# Altium PCB PCB1.PcbDoc
Units mil, origin at the board's own origin, x right, y up, seen from the top; angles counter-clockwise.
Board outline 6000 x 4000 mil, 2 copper layers (Top Layer, Bottom Layer); 15 components, 45 nets, 102 pads, 0 vias.
Unrouted connection lines stored in the file: 38.
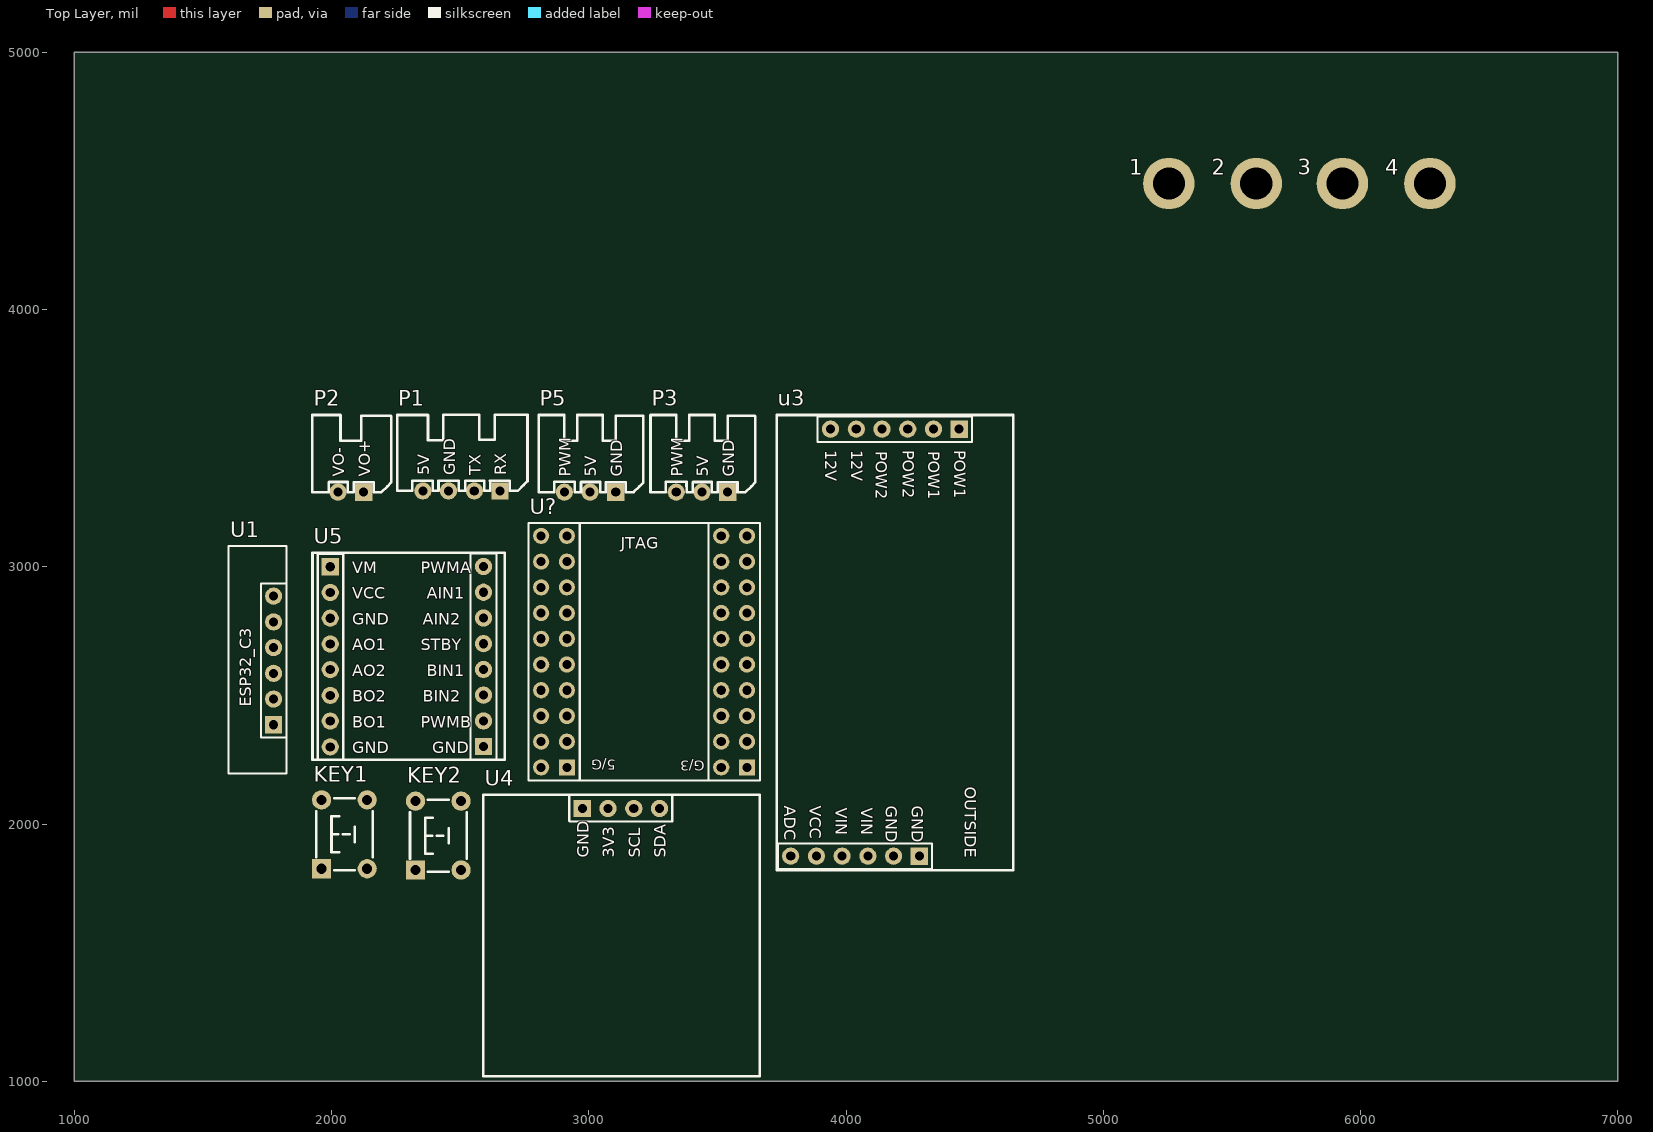
[diagram p0: Top Layer view]
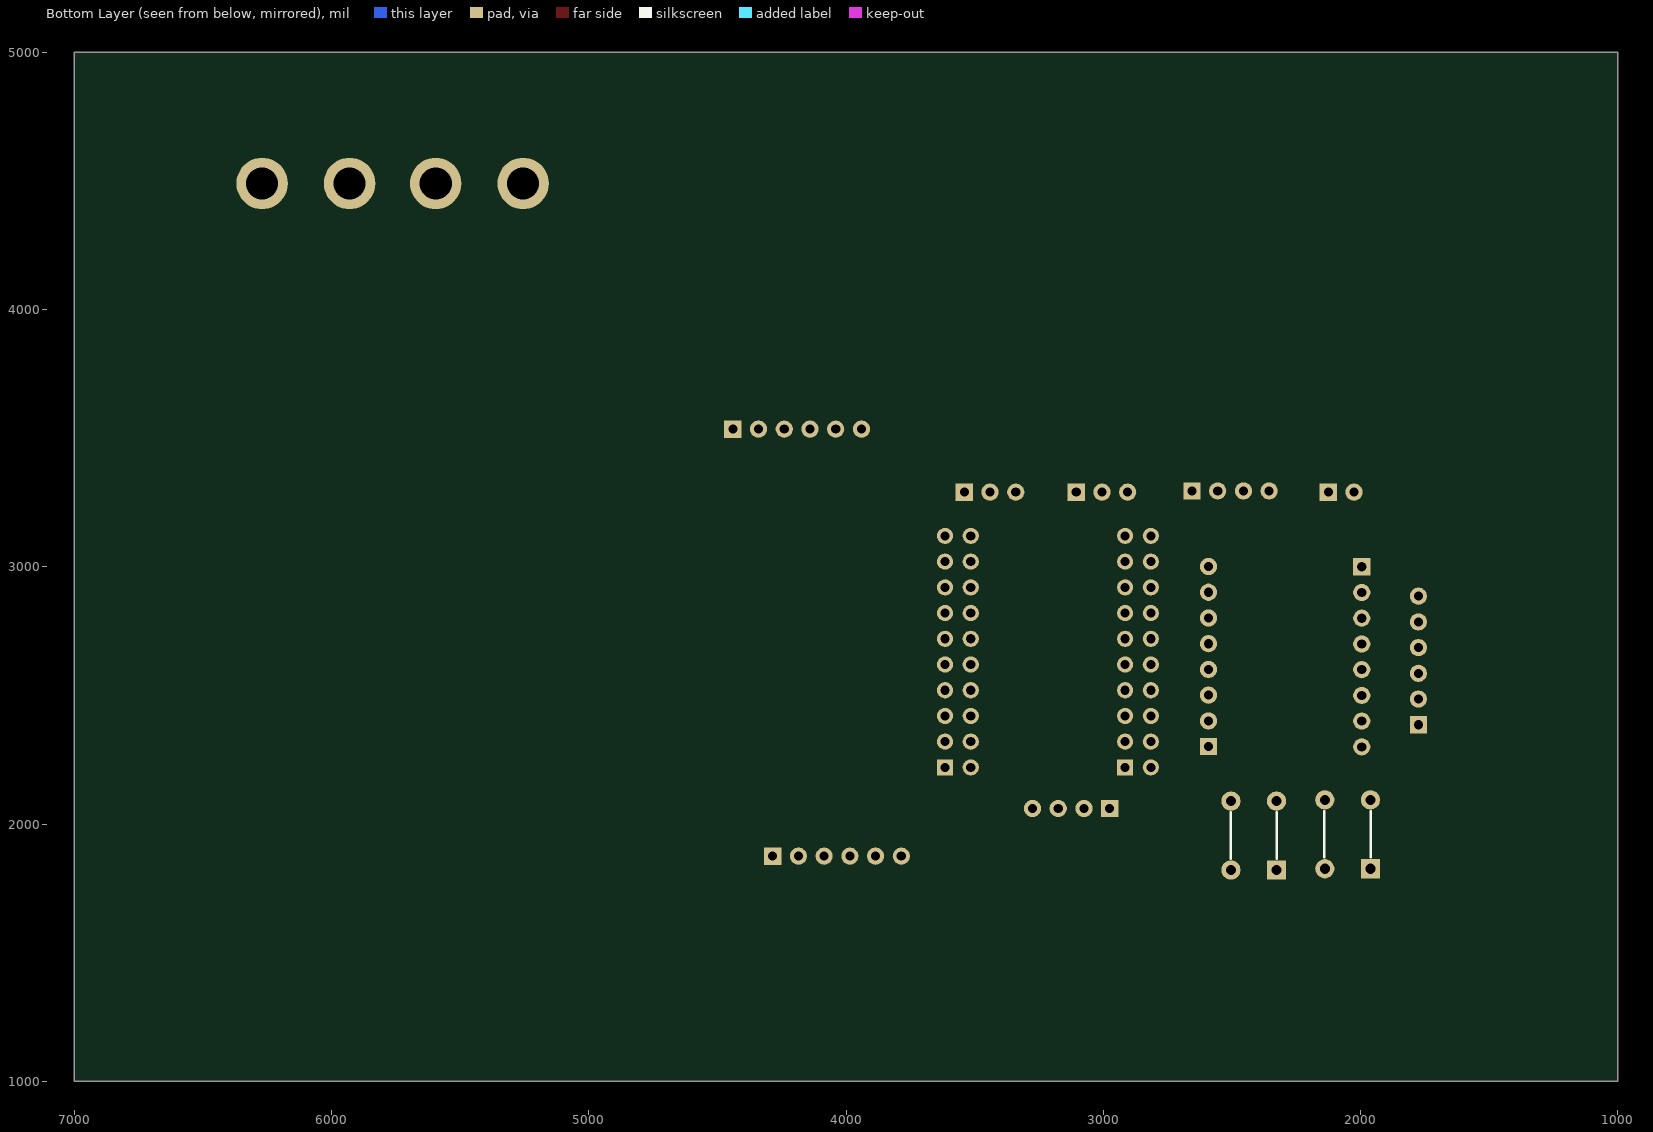
[diagram p1: Bottom Layer view, seen from below]

## Layer stack, top to bottom
Top Solder: solder mask 0.4, Solder Resist, Dk 3.5
Top Layer: signal copper 1.4
Dielectric 1: dielectric 12.6, FR-4, Dk 4.8
Bottom Layer: signal copper 1.4
Bottom Solder: solder mask 0.4, Solder Resist, Dk 3.5

## Board outline
1000,1000 7000,1000 7000,5000 1000,5000

## Design rules (kind name [scope] priority, off if disabled: settings)
Clearance [All] p1: gap=10 ignorepadtopadclearanceinfootprint=FALSE
PolygonConnect [All] p1: connectstyle=Relief reliefconductorwidth=10 reliefentries=4 polygonreliefangle="90 Angle" airgapwidth=10
RoutingVias [All] p1: holewidth=28 width=50 viastyle="Through Hole" minholewidth=28 minwidth=50 maxholewidth=28 maxwidth=50
SolderMaskExpansion [All] p1: expansion=4 istentingtop=FALSE
SupplyNets "Schematic Supply Nets_5" [InNet('5V')] p1: voltage=0.000
SupplyNets "Schematic Supply Nets_4" [InNet('5V_POW')] p2: voltage=0.000
SupplyNets "Schematic Supply Nets_3" [InNet('12V')] p3: voltage=0.000
SupplyNets "Schematic Supply Nets_2" [InNet('3V3_MCU')] p4: voltage=0.000
SupplyNets "Schematic Supply Nets_1" [InNet('3V3')] p5: voltage=0.000
SupplyNets "Schematic Supply Nets" [InNet('GND')] p6: voltage=0.000
Width [All] p1: maxlimit=10 minlimit=10 preferedwidth=10
30 further rules are at their usual default settings.

## Components (designator, comment, footprint, x,y, rotation, side; value= is the part's Value field where it differs from the comment)
1 "M3" "M3 125X200" 5255,4490 r90 top
2 "M3" "M3 125X200" 5595,4490 r90 top
3 "M3" "M3 125X200" 5930,4490 r90 top
4 "M3" "M3 125X200" 6270,4490 r90 top
KEY1 "mod_buttom" MOD_BUTTOM 2050,1950 r90 top
KEY2 "mod_buttom" MOD_BUTTOM 2415,1945 r90 top
P1 "port_uart_4p" XH2.54_4P 2510,3450 r0 top
P2 "port_mot_2p" XH2.54_2P 2070,3415 r0 top
P3 "port_pwm_3p" XH2.54_3P 3455,3425 r0 top
P5 "port_pwm_3p" XH2.54_3P 3020,3425 r0 top
U1 "c3_hw_1" C3_HW_1 1774.91,2635.64 r90 top
u3 "pow_hw_2" POW_HW_2 4210,2760 r270 top
U4 "mod_oled" mod_oled 3129.91,2058.15 r0 top
U5 "mod_tb6612" MOD_TB6612 2300,2650 r0 top
U? "f1_hw_1_gw" F1_HW_1_GW 3225,2685 r270 top

## Footprints (in the part's own frame and the unit in brackets; to place one, negate y for a bottom-side part, rotate by r counter-clockwise, add the part's x,y. Pads: shape width x height; smd on the part's side, far side on the other; paste and mask are expansions set on the pad)
C3_HW_1 [mm]
  rect 1.7x1.7 hole 0.9: 1(-6.35,0)
  round 1.7 hole 0.9: 2(-3.81,0) 3(-1.27,0) 4(1.27,0) 5(3.81,0) 6(6.35,0)
  silkscreen extent -11.18,-1.27 11.3,4.45, body extent -11.18,-1.27 11.3,4.45, height 8.5
F1_HW_1_GW [mm]
  rect 1.6x1.6 hole 0.9: 1(11.811,9.906) 21(11.811,-7.874)
  round 1.6 hole 0.9: 2(11.811,7.366) 3(9.271,9.906) 4(9.271,7.366) 5(6.731,9.906) 6(6.731,7.366) 7(4.191,9.906) 8(4.191,7.366) 9(1.651,9.906) 10(1.651,7.366) 11(-0.889,9.906) 12(-0.889,7.366) 13(-3.429,9.906) 14(-3.429,7.366) 15(-5.969,9.906) 16(-5.969,7.366) 17(-8.509,9.906) 18(-8.509,7.366) 19(-11.049,9.906) 20(-11.049,7.366) 22(11.811,-10.414) 23(9.271,-7.874) 24(9.271,-10.414) 25(6.731,-7.874) 26(6.731,-10.414) 27(4.191,-7.874) 28(4.191,-10.414) 29(1.651,-7.874) 30(1.651,-10.414) 31(-0.889,-7.874) 32(-0.889,-10.414) 33(-3.429,-7.874) 34(-3.429,-10.414) 35(-5.969,-7.874) 36(-5.969,-10.414) 37(-8.509,-7.874) 38(-8.509,-10.414) 39(-11.049,-7.874) 40(-11.049,-10.414)
  silkscreen extent -12.32,-11.68 13.08,11.18, body extent -12.38,-11.68 13.08,11.18, height 8.5
"M3 125X200" [mil] "M3螺丝孔，孔125Mil，焊盘200Mil"
  round 200 hole 125: 1(0,0)
MOD_BUTTOM [mm]
  rect 1.9x1.9 hole 1: 1(-3.146,2.25)
  round 1.9 hole 1: 2(-3.146,-2.25) 3(3.654,-2.25) 4(3.654,2.25)
  silkscreen extent -3.3,-2.79 3.81,2.79, body extent -3.85,-3 4.36,3, height 4.25
mod_oled [mm] "外购屏幕模块接口"
  rect 1.7x1.7 hole 0.9: 1(-3.935,0.047)
  round 1.7 hole 0.9: 2(-1.395,0.047) 3(1.145,0.047) 4(3.685,0.047)
  silkscreen extent -13.72,-26.4 13.58,1.4, body extent -13.72,-26.42 13.59,1.4, height 8.5
MOD_TB6612 [mm]
  rect 1.7x1.7 hole 0.9: 1(-7.747,8.89) 16(7.391,-8.867)
  round 1.7 hole 0.9: 2(-7.747,6.35) 3(-7.747,3.81) 4(-7.747,1.27) 5(-7.747,-1.27) 6(-7.747,-3.81) 7(-7.747,-6.35) 8(-7.747,-8.89) 9(7.391,8.913) 10(7.391,6.373) 11(7.391,3.833) 12(7.391,1.293) 13(7.391,-1.247) 14(7.391,-3.787) 15(7.391,-6.327)
  silkscreen extent -9.5,-10.16 9.5,10.29, body extent -9.5,-10.16 9.5,10.29, height 8.5
POW_HW_2 [mm] "pow_hw_2"
  round 1.7 hole 0.9: 0(22.479,-8.255) 1(22.479,-5.715) 1(22.479,-3.175) 2(22.479,-0.635) 3(-19.685,-6.858) 3(-19.685,-4.318) 4(-19.685,-1.778) 4(-19.685,0.762) 5(-19.685,3.302) 6(22.479,-10.795)
  rect 1.7x1.7 hole 0.9: 2(22.479,1.905) 5(-19.685,5.842)
  silkscreen extent -21.08,-12.19 23.88,11.18, body extent -21.08,-12.19 23.88,11.18, height 8.5
XH2.54_2P [mm]
  rect 1.7x1.7 hole 0.9: 1(1.397,-3.175)
  round 1.7 hole 0.9: 2(-1.143,-3.175)
  silkscreen extent -3.68,-3.17 4.11,4.44, body extent -3.64,-3.52 3.9,4.17, height 5.73
XH2.54_3P [mm]
  rect 1.7x1.7 hole 0.9: 1(2.159,-3.429)
  round 1.7 hole 0.9: 2(-0.381,-3.429) 3(-2.921,-3.429)
  silkscreen extent -5.46,-3.43 4.87,4.19, body extent -5.42,-3.78 4.66,3.92, height 5.73
XH2.54_4P [mm]
  rect 1.7x1.7 hole 0.9: 1(3.683,-3.937)
  round 1.7 hole 0.9: 2(1.143,-3.937) 3(-1.397,-3.937) 4(-3.937,-3.937)
  silkscreen extent -6.48,-3.94 6.4,3.59, body extent -6.44,-4.29 6.18,3.41, height 5.73

## Part data
1 2 3 4: library part prot_m3, "m3铜柱孔", BOM名称=铜柱孔, 学习资源=www.ooocke.com, 版权归属=源创客
KEY1 KEY2: "6*6*4.3按键"
P1: "串口接口/SPP蓝牙模块 / XH2.54弯排针4p/4p排母"
P2: "开环直流电机接口 / XH2.54弯排针2p"
P3 P5: "舵机接口 / XH2.54弯排针3p"
U1: "ESP32C3蓝牙模块 / 6p排母"
u3: "两路升降压电源模块 / 6p排母*2"
U4: "外购屏幕模块"
U5: "TB6612模块 / 8p排母*2"

## Nets (pads, with @x,y where several pads share a name; then routed paths per layer and width w, separated by ;. In a path a pad name is that pad's centre, name@x,y a point inside that pad or via, vN(x,y) a via of type N, cw(c..) or ccw(c..) an arc to the next point about the centre after c; other vN are vias at no path point)
3V3: U4.2 U5.2 U5.12
3V3_MCU: U?.2
5V: P1.4 U1.5 u3.5 U?.21
5V_POW: P3.2 P5.2 u3.4
12V: u3.3 U5.1
AO1: P2.1 U5.4
AO2: P2.2 U5.5
BOOT0: U?.35
GND: KEY1.4 KEY2.4 P1.3 P3.1 P5.1 U1.4 u3.2 U4.1 U5.3 U5.8 U5.16 U?.1 U?.22
NRST: U?.12
PA0: U?.20
PA1: U?.19
PA2: P1.2 U?.18
PA3: U?.17
PA4: U?.16
PA5: U?.15
PA6: U5.9 U?.14
PA7: U?.13
PA8: U5.11 U?.23
PA9: U1.2 U?.24
PA10: U1.3 U?.25
PA11: U?.26
PA12: U?.27
PA13: U?.28
PA14: U?.29
PA15: P3.3 U?.30
PB0: U?.11
PB1: U?.9
PB2: U?.10
PB3: P5.3 U?.32
PB4: U4.4 U?.31
PB5: U4.3 U?.34
PB6: U?.33
PB7: U?.36
PB8: U5.10 U?.38
PB9: U?.37
PB10: U?.7
PB11: U?.8
PB12: U?.5
PB13: U?.6
PB14: KEY1.3 U?.3
PB15: KEY2.3 U?.4
PC13: U?.39
USART2_RX: P1.1
VBAT: U?.40
pads on no net: 1.1 2.1 3.1 4.1 KEY1.1 KEY1.2 KEY2.1 KEY2.2 U1.1 U1.6 u3.0 u3.1 u3.6 U5.6 U5.7 U5.13 U5.14 U5.15

## Text inside footprints (layer, text, board x,y; h text height)
P1: Top Overlay "5V" at 2380,3355 h45 r90; Top Overlay "GND" at 2480,3355 h45 r90; Top Overlay "TX" at 2580,3355 h45 r90; Top Overlay "RX" at 2680,3355 h45 r90
P2: Top Overlay "VO-" at 2050,3350 h45 r90; Top Overlay "VO+" at 2150,3350 h45 r90
P3: Top Overlay "GND" at 3565,3350 h45 r90; Top Overlay "5V" at 3465,3350 h45 r90; Top Overlay "PWM" at 3365,3350 h45 r90
P5: Top Overlay "GND" at 3130,3350 h45 r90; Top Overlay "5V" at 3030,3350 h45 r90; Top Overlay "PWM" at 2930,3350 h45 r90
U1: Top Overlay "ESP32_C3" at 1687.41,2455.64 h45 r90
u3: Top Overlay "POW2" at 4115,3450 h45 r270; Top Overlay "POW1" at 4320,3450 h45 r270; Top Overlay "12V" at 3920,3452.38 h45 r270; Top Overlay "12V" at 4020,3452.38 h45 r270; Top Overlay "POW2" at 4220,3452.38 h45 r270; Top Overlay "POW1" at 4420,3452.38 h45 r270; Top Overlay "GND" at 4155,2070 h45 r270; Top Overlay "GND" at 4255,2070 h45 r270; Top Overlay "VIN" at 3960,2062.5 h45 r270; Top Overlay "VIN" at 4060,2062.5 h45 r270; Top Overlay "ADC" at 3760,2070 h45 r270; Top Overlay "VCC" at 3860,2070 h45 r270; Top Overlay "OUTSIDE" at 4461.23,2144.16 h45 r270
U4: Top Overlay "3V3" at 3099.91,1868.15 h45 r90; Top Overlay "SCL" at 3199.91,1868.15 h45 r90; Top Overlay "SDA" at 3299.91,1868.15 h45 r90; Top Overlay "GND" at 2999.91,1868.15 h45 r90
U5: Top Overlay "VM" at 2080,2975 h45; Top Overlay "VCC" at 2080,2875 h45; Top Overlay "AO1" at 2080,2675 h45; Top Overlay "AO2" at 2080,2575 h45; Top Overlay "BO1" at 2080,2375 h45; Top Overlay "BO2" at 2080,2475 h45; Top Overlay "GND" at 2080,2275 h45; Top Overlay "GND" at 2080,2775 h45; Top Overlay "PWMA" at 2347.5,2975 h45; Top Overlay "AIN1" at 2370,2875 h45; Top Overlay "AIN2" at 2355,2775 h45; Top Overlay "STBY" at 2347.5,2675 h45; Top Overlay "BIN1" at 2370,2575 h45; Top Overlay "BIN2" at 2355,2475 h45; Top Overlay "PWMB" at 2347.5,2375 h45; Top Overlay "GND" at 2392.49,2275 h45
U?: Top Overlay "5/G" at 3105,2250 h39.37 r180; Top Overlay "G/3" at 3450,2245 h39.37 r180; Top Overlay "JTAG" at 3125,3070 h45